# EAGLE board Clock_rev1 (EAGLE 9.6.2)
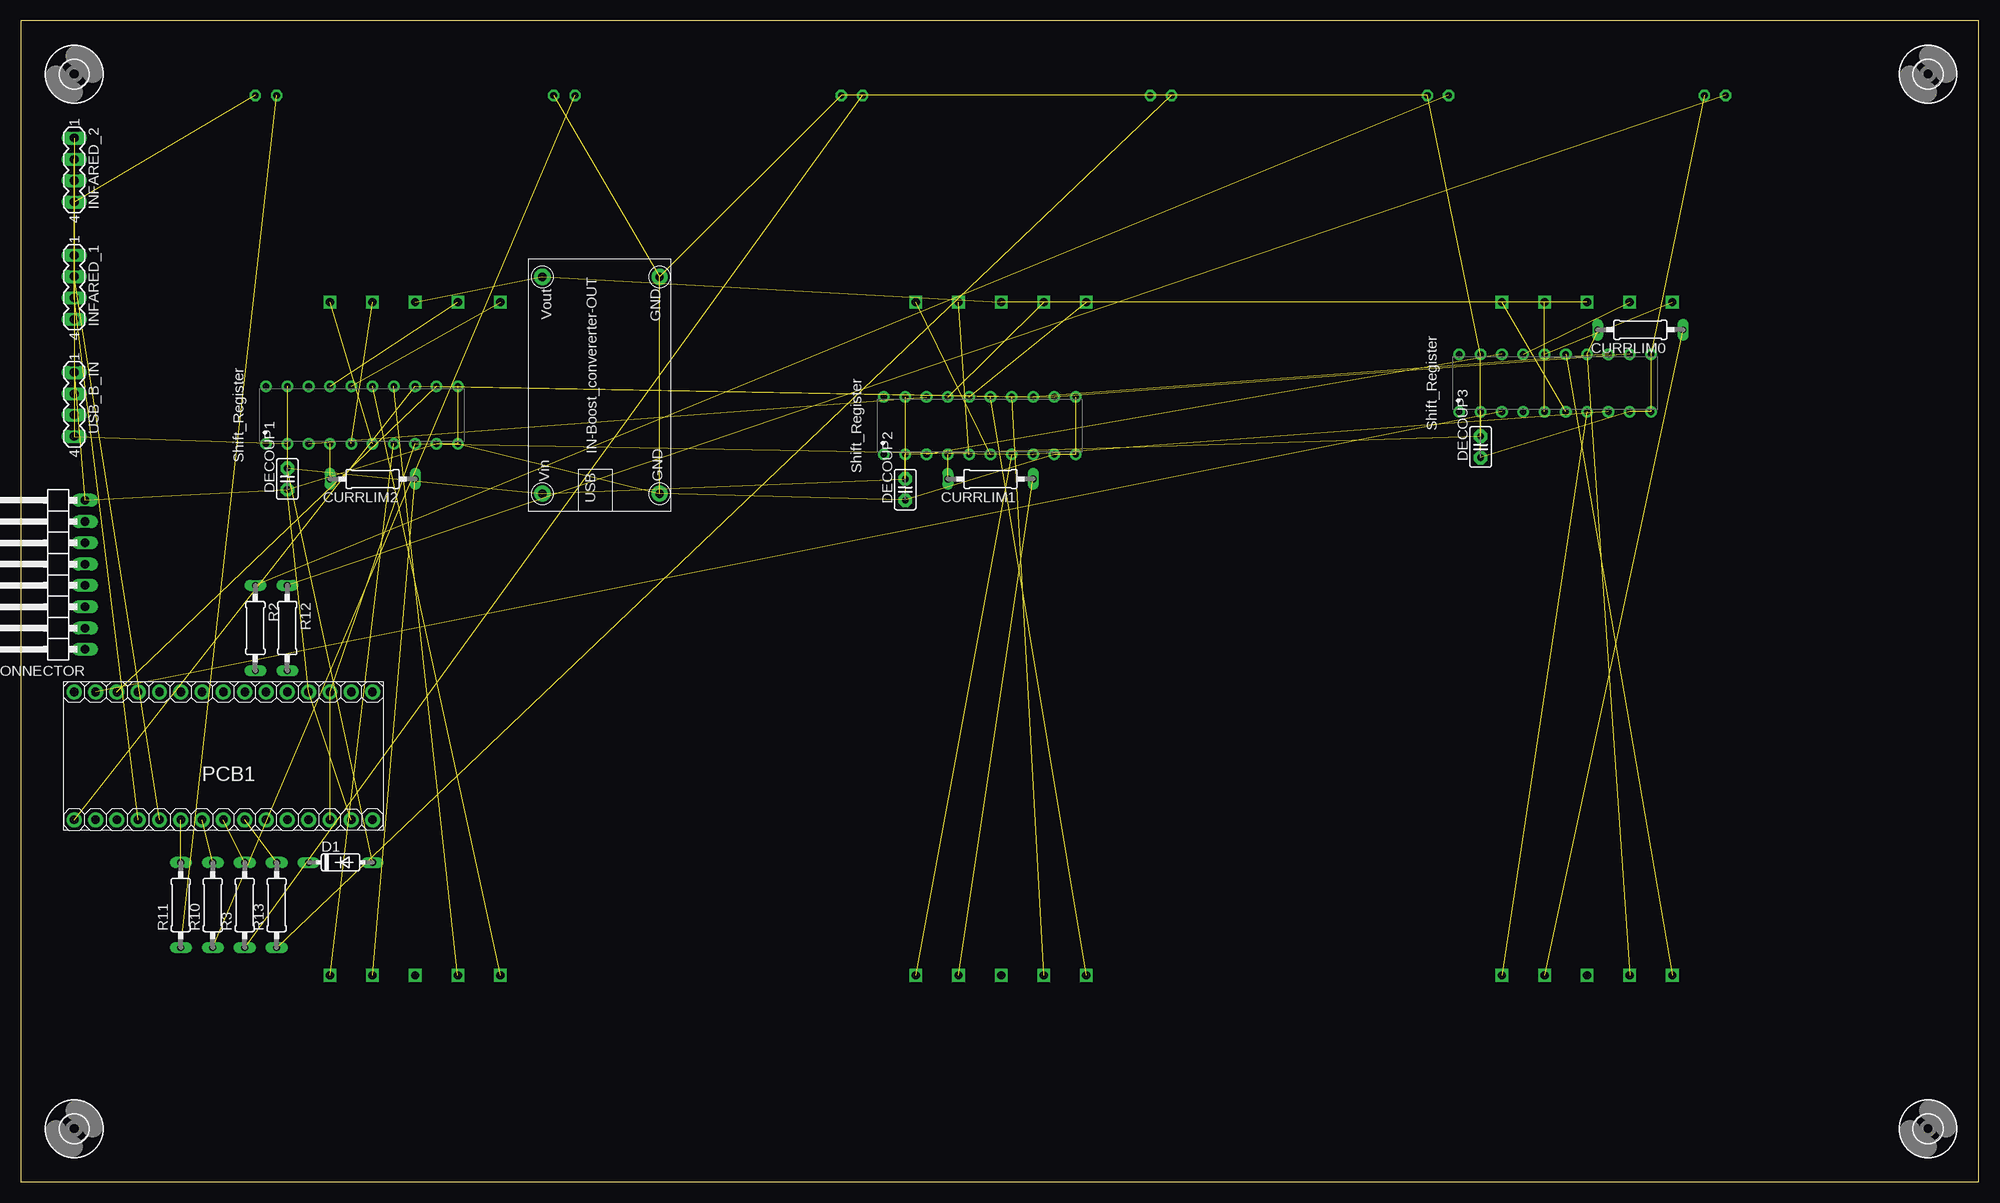
[diagram p0: board, top side]
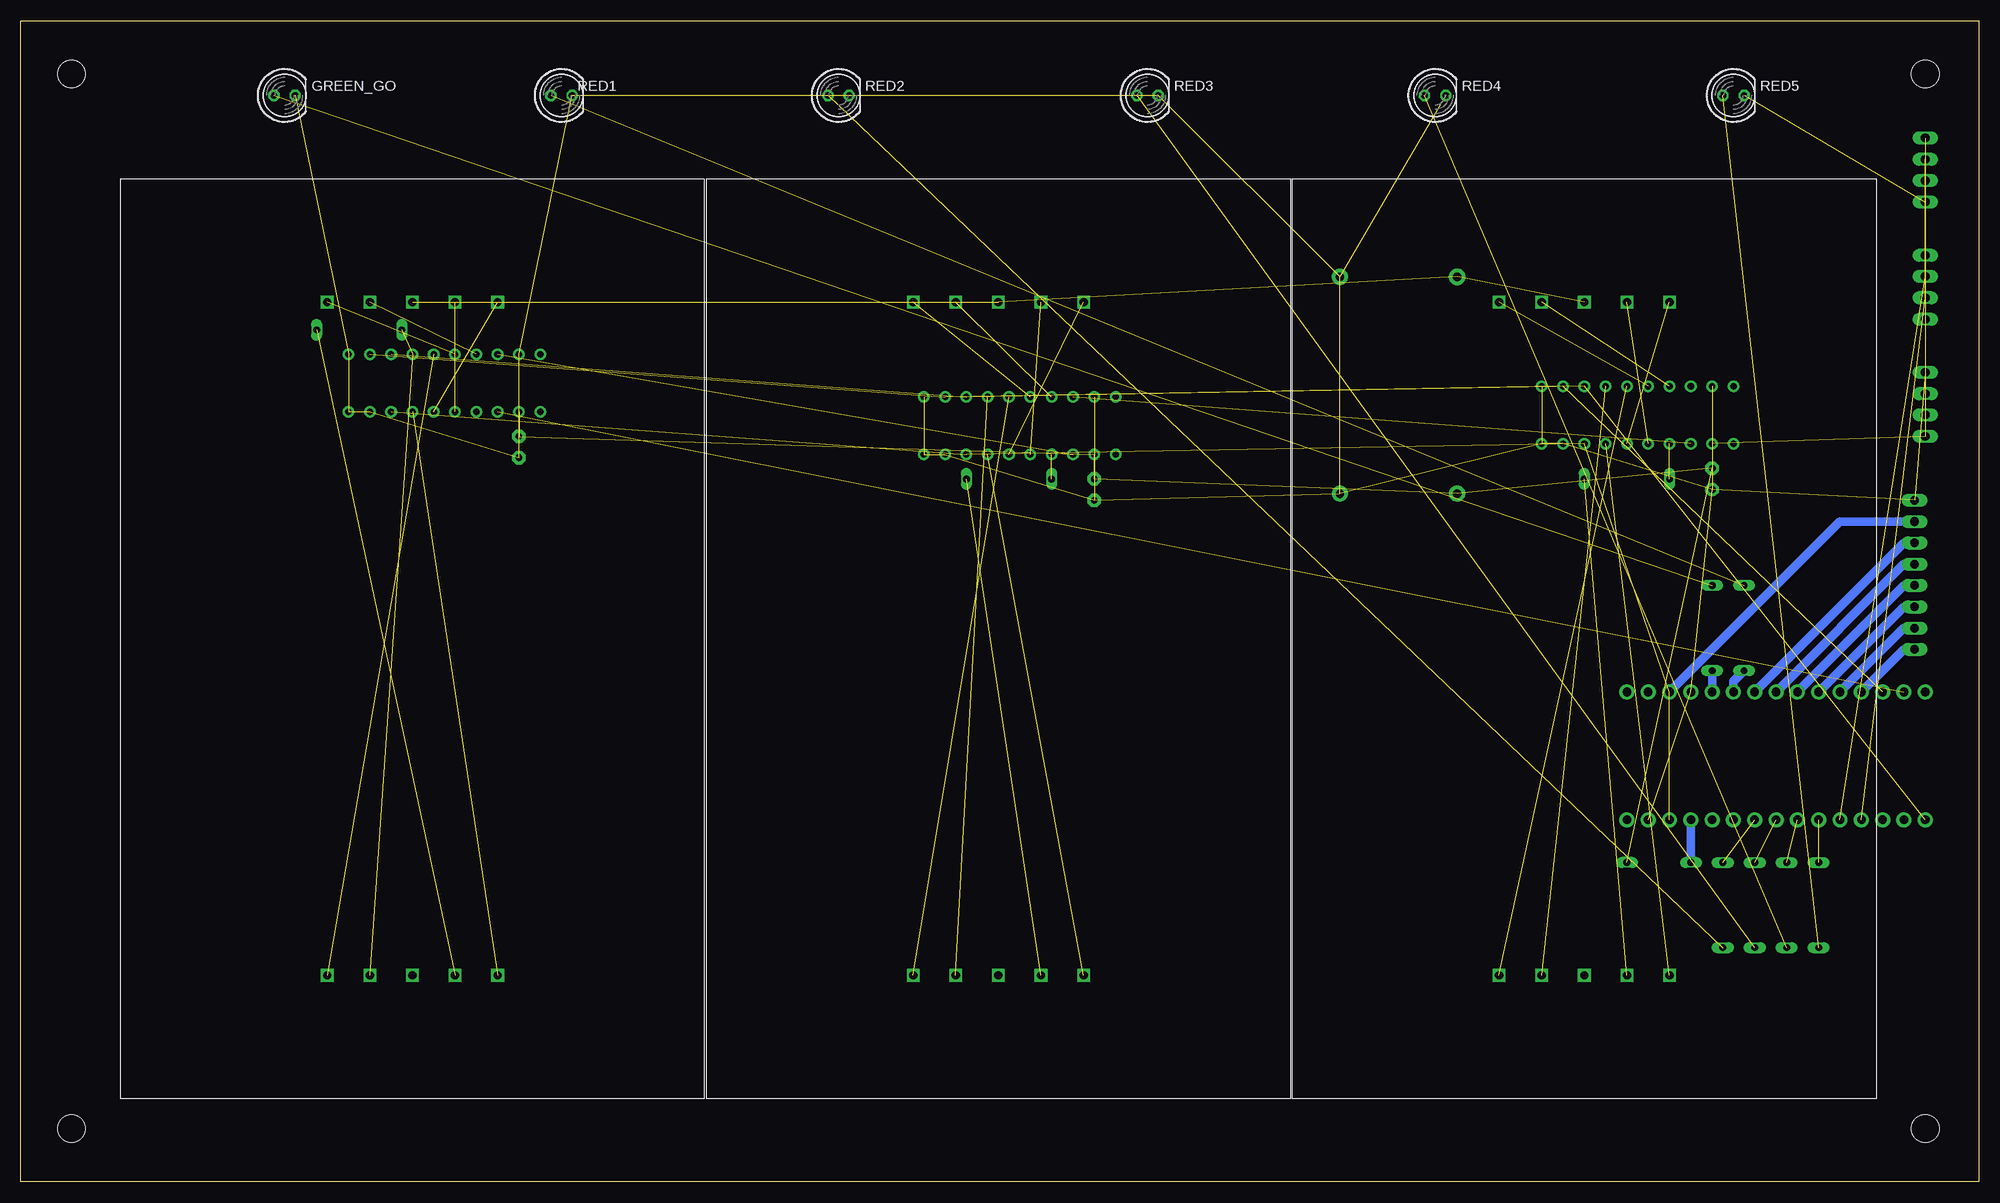
[diagram p1: board, bottom side, seen from below]

Size 233.35 x 138.42 mm. Coordinates in mm from the lower left corner, seen from the top.
Outline: 0,0 233.35,0 233.35,138.42 0,138.42 0,0
Copper layers (1*16): Top 0.035mm / dielectric 1.5mm / Bottom 0.035mm
Design rules "default": minimum track width 6mil, minimum drill 0.35mm, track to track 6mil, track to pad 6mil, pad to pad 6mil, via to via 6mil, smd to smd 6mil, copper to edge 40mil, drill to drill 6mil, minimum pad ring 10mil, minimum via ring 8mil, stop-mask expansion 4mil, vias tented up to drill 0mil, thermal gap 10mil

## Footprints (pad centres in the part's own frame; a part is rotated, then mirrored left to right if it is on the bottom)
1X08/90 = drill 1.016 long: 1 -8.89,-3.81; 2 -6.35,-3.81; 3 -3.81,-3.81; 4 -1.27,-3.81; 5 1.27,-3.81; 6 3.81,-3.81; 7 6.35,-3.81; 8 8.89,-3.81
0207/10 = drill 0.813 long: 1 -5.08,0; 2 5.08,0
DO35-7 = drill 0.813 long: A 3.81,0; C -3.81,0
C2.5-2 = drill 0.813 pad 1.6 octagon: 1 -1.27,0; 2 1.27,0
LED5MM = drill 0.813 octagon: A -1.27,0; K 1.27,0
MA04-1 = drill 1.016 long: 1 -3.81,0; 2 -1.27,0; 3 1.27,0; 4 3.81,0
7SEG_LED = drill 1 square: A 5.08,40.132; B 10.16,40.132; C 10.16,-40.132; CA 0,40.132; COM 0,-40.132; D -5.08,-40.132; DP 5.08,-40.132; E -10.16,-40.132; F -10.16,40.132; G -5.08,40.132
ARDUINO_NANO_SMOL = drill 1.016 pad 1.778: 3V3 -13.97,-7.62; 5V 11.43,-7.62; A0 -8.89,-7.62; A1 -6.35,-7.62; A2 -3.81,-7.62; A3 -1.27,-7.62; A4 1.27,-7.62; A5 3.81,-7.62; A6 6.35,-7.62; A7 8.89,-7.62; D2 8.89,7.62; D3 6.35,7.62; D4 3.81,7.62; D5 1.27,7.62; D6 -1.27,7.62; D7 -3.81,7.62; D8 -6.35,7.62; D9 -8.89,7.62; D10 -11.43,7.62; D11 -13.97,7.62; D12 -16.51,7.62; D13 -16.51,-7.62; GND 11.43,7.62; GND@2 16.51,-7.62; REF -11.43,-7.62; RESET 13.97,7.62; RESET@2 13.97,-7.62; RX0 16.51,7.62; TX1 19.05,7.62; VIN 19.05,-7.62
SHIFT_REGISTER = drill 0.788 pad 1.388: 1 -3.429,11.43; 2 -3.429,8.89; 3 -3.429,6.35; 4 -3.429,3.81; 5 -3.429,1.27; 6 -3.429,-1.27; 7 -3.429,-3.81; 8 -3.429,-6.35; 9 -3.429,-8.89; 10 -3.429,-11.43; 11 3.429,-11.43; 12 3.429,-8.89; 13 3.429,-6.35; 14 3.429,-3.81; 15 3.429,-1.27; 16 3.429,1.27; 17 3.429,3.81; 18 3.429,6.35; 19 3.429,8.89; 20 3.429,11.43
3,3 = hole 3.3: 0,0
BOOST_CONV = drill 1 pad 1.93: P$1 2.05,1.35; P$2 2.05,15.32; P$3 27.9,15.32; P$4 27.9,1.35

## Placement (x,y rotation side)
BUTTONS_CONNECTOR  [1X08/90]  3.81,72.39 90 top
CURRLIM0  270  [0207/10]  193.04,101.6 180 top
CURRLIM1  270  [0207/10]  115.57,83.82 180 top
CURRLIM2  270  [0207/10]  41.91,83.82 180 top
D1  1N4148DO35-7  [DO35-7]  38.1,38.1 0 top
DECOUP1  0.1uF  [C2.5-2]  31.75,83.82 90 top
DECOUP2  0.1uF  [C2.5-2]  105.41,82.55 90 top
DECOUP3  0.1uF  [C2.5-2]  173.99,87.63 90 top
GREEN_GO  [LED5MM]  201.93,129.54 0 bottom
INFARED_1  [MA04-1]  6.35,106.68 270 top
INFARED_2  [MA04-1]  6.35,120.65 270 top
MINUTES  7SEG_LED_A-3001SR  [7SEG_LED]  186.69,64.77 0 bottom
PCB1  ARDUINO_NANO_NOI2CSMOL  [ARDUINO_NANO_SMOL]  22.86,50.8 0 top
R2  270  [0207/10]  27.94,66.04 270 top
R3  270  [0207/10]  26.67,33.02 90 top
R10  270  [0207/10]  22.86,33.02 90 top
R11  270  [0207/10]  19.05,33.02 90 top
R12  270  [0207/10]  31.75,66.04 270 top
R13  270  [0207/10]  30.48,33.02 90 top
RED1  [LED5MM]  168.91,129.54 0 bottom
RED2  [LED5MM]  135.89,129.54 0 bottom
RED3  [LED5MM]  99.06,129.54 0 bottom
RED4  [LED5MM]  64.77,129.54 0 bottom
RED5  [LED5MM]  29.21,129.54 0 bottom
SECONDS_ONES  7SEG_LED_A-3001SR  [7SEG_LED]  46.99,64.77 0 bottom
SECONDS_TENS  7SEG_LED_A-3001SR  [7SEG_LED]  116.84,64.77 0 bottom
SP0  SHIFT_REGISTER_TPIC6C595  [SHIFT_REGISTER]  182.88,95.25 90 top
SP1  SHIFT_REGISTER_TPIC6C595  [SHIFT_REGISTER]  114.3,90.17 90 top
SP2  SHIFT_REGISTER_TPIC6C595  [SHIFT_REGISTER]  40.64,91.44 90 top
U$1  [3,3]  6.35,132.08 0 top
U$2  [3,3]  6.35,6.35 0 top
U$3  [3,3]  227.33,132.08 0 top
U$4  BOOST_CONV  [BOOST_CONV]  77.47,80.01 90 top
U$5  [3,3]  227.33,6.35 0 top
USB_B_IN  [MA04-1]  6.35,92.71 270 top

## Library data of the parts
BUTTONS_CONNECTOR = pinhead
CURRLIM0 CURRLIM1 CURRLIM2 R2 R3 R10-R13 = BJH_LIB; SPICEPREFIX: R
D1 = diode
DECOUP1-DECOUP3 = capacitor-wima
GREEN_GO RED1-RED5 = led
INFARED_1 INFARED_2 USB_B_IN = con-lstb; OC_FARNELL: unknown; OC_NEWARK: unknown
MINUTES SECONDS_ONES SECONDS_TENS SP0 SP1 SP2 = ARC_Clock
PCB1 = ElcPartsLibrary
U$1-U$3 U$5 = holes
U$4 = BJH_LIB

## Nets
1MIN_IN: BUTTONS_CONNECTOR.2 PCB1.D8
5V: D1.A DECOUP1.2 DECOUP2.2 DECOUP3.2 INFARED_1.1 INFARED_2.1 SP0.2 SP1.2 SP2.2 U$4.P$2 USB_B_IN.4
12V: MINUTES.CA SECONDS_ONES.CA SECONDS_TENS.CA U$4.P$3
30S_IN: BUTTONS_CONNECTOR.3 PCB1.D7
A0: MINUTES.A SP0.5
A1: SECONDS_TENS.A SP1.5
A2: SECONDS_ONES.A SP2.5
B0: MINUTES.B SP0.6
B1: SECONDS_TENS.B SP1.6
B2: SECONDS_ONES.B SP2.6
C0: MINUTES.C SP0.7
C1: SECONDS_TENS.C SP1.7
C2: SECONDS_ONES.C SP2.7
D0: CURRLIM0.2 MINUTES.D SP0.14
D1: SECONDS_TENS.D SP1.14
D2: SECONDS_ONES.D SP2.14
D+: USB_B_IN.2
D-: USB_B_IN.3
DP0: SP0.4
DP1: CURRLIM1.2 SP1.4
DP2: CURRLIM2.2 SP2.4
E0: MINUTES.E SP0.15
E1: SECONDS_TENS.E SP1.15
E2: SECONDS_ONES.E SP2.15
F0: MINUTES.F SP0.16
F1: SECONDS_TENS.F SP1.16
F2: SECONDS_ONES.F SP2.16
G0: MINUTES.G SP0.17
G1: SECONDS_TENS.G SP1.17
G2: SECONDS_ONES.G SP2.17
GND: BUTTONS_CONNECTOR.8 DECOUP1.1 DECOUP2.1 DECOUP3.1 GREEN_GO.K INFARED_1.4 INFARED_2.4 PCB1.GND PCB1.GND@2 RED1.K RED2.K RED3.K RED4.K RED5.K SP0.9 SP0.10 SP0.11 SP0.19 SP1.9 SP1.10 SP1.11 SP1.19 SP2.9 SP2.10 SP2.11 SP2.19 U$4.P$1 U$4.P$4 USB_B_IN.1
GREEN: PCB1.D2 R12.2
IF_IN: INFARED_1.3 INFARED_2.3 PCB1.A0
IF_OUT: INFARED_1.2 INFARED_2.2 PCB1.A1
MISC: BUTTONS_CONNECTOR.1 PCB1.D9
N$1: PCB1.D11 SP0.3
N$2: D1.C PCB1.5V
N$3: CURRLIM0.1 MINUTES.DP
N$4: CURRLIM1.1 SECONDS_TENS.DP
N$5: CURRLIM2.1 SECONDS_ONES.DP
N$6: SP0.18 SP1.3
N$7: SP1.18 SP2.3
N$8: PCB1.D13 SP0.13 SP1.13 SP2.13
N$11: R2.1 RED1.A
N$12: R13.1 RED2.A
N$13: R3.1 RED3.A
N$14: R10.1 RED4.A
N$15: R11.1 RED5.A
N$16: GREEN_GO.A R12.1
N$19: PCB1.A5 R13.2
N$20: PCB1.A4 R3.2
N$21: PCB1.A3 R10.2
N$22: PCB1.A2 R11.2
N$36: SECONDS_ONES.COM
N$40: SECONDS_TENS.COM
N$44: MINUTES.COM
PAUSE_IN: BUTTONS_CONNECTOR.5 PCB1.D5
REDONE: PCB1.D3 R2.2
RESUME_IN: BUTTONS_CONNECTOR.4 PCB1.D6
RST: BUTTONS_CONNECTOR.7 PCB1.RESET PCB1.RESET@2 SP0.8 SP1.8 SP2.8
SS: PCB1.D10 SP0.12 SP1.12 SP2.12
START_IN: BUTTONS_CONNECTOR.6 PCB1.D4

## Tracks (layer width: path | path; a pad name or v marks a point on that pad's centre or on a via)
1MIN_IN
  Bottom 1.016: PCB1.D8 8.89,66.04 BUTTONS_CONNECTOR.2
5V  (10 unrouted)
12V  (3 unrouted)
30S_IN
  Bottom 1.016: PCB1.D7 8.89,68.58 BUTTONS_CONNECTOR.3
A0  (1 unrouted)
A1  (1 unrouted)
A2  (1 unrouted)
B0  (1 unrouted)
B1  (1 unrouted)
B2  (1 unrouted)
C0  (1 unrouted)
C1  (1 unrouted)
C2  (1 unrouted)
D0  (2 unrouted)
D1  (1 unrouted)
D2  (1 unrouted)
DP1  (1 unrouted)
DP2  (1 unrouted)
E0  (1 unrouted)
E1  (1 unrouted)
E2  (1 unrouted)
F0  (1 unrouted)
F1  (1 unrouted)
F2  (1 unrouted)
G0  (1 unrouted)
G1  (1 unrouted)
G2  (1 unrouted)
GND  (28 unrouted)
GREEN
  Bottom 1.016: R12.2 PCB1.D2
IF_IN  (2 unrouted)
IF_OUT  (2 unrouted)
MISC
  Bottom 1.016: PCB1.D9 8.89,63.5 BUTTONS_CONNECTOR.1
N$1  (1 unrouted)
N$2
  Bottom 1.016: PCB1.5V D1.C
N$3  (1 unrouted)
N$4  (1 unrouted)
N$5  (1 unrouted)
N$6  (1 unrouted)
N$7  (1 unrouted)
N$8  (3 unrouted)
N$11  (1 unrouted)
N$12  (1 unrouted)
N$13  (1 unrouted)
N$14  (1 unrouted)
N$15  (1 unrouted)
N$16  (1 unrouted)
N$19  (1 unrouted)
N$20  (1 unrouted)
N$21  (1 unrouted)
N$22  (1 unrouted)
PAUSE_IN
  Bottom 1.016: PCB1.D5 8.89,73.66 BUTTONS_CONNECTOR.5
REDONE
  Bottom 1.016: R2.2 29.21,59.69 PCB1.D3
RESUME_IN
  Bottom 1.016: PCB1.D6 8.89,71.12 BUTTONS_CONNECTOR.4
RST  (4 unrouted)
  Bottom 1.016: PCB1.RESET 16.51,78.74 BUTTONS_CONNECTOR.7
SS  (3 unrouted)
START_IN
  Bottom 1.016: PCB1.D4 8.89,76.2 BUTTONS_CONNECTOR.6